# Altium PCB hazi_kiindulas.PcbDoc
Units mil, origin at the board's own origin, x right, y up, seen from the top; angles counter-clockwise.
Board outline 3550 x 2300 mil, 2 copper layers (Top Layer, Bottom Layer); 101 components, 50 nets, 318 pads, 95 vias.
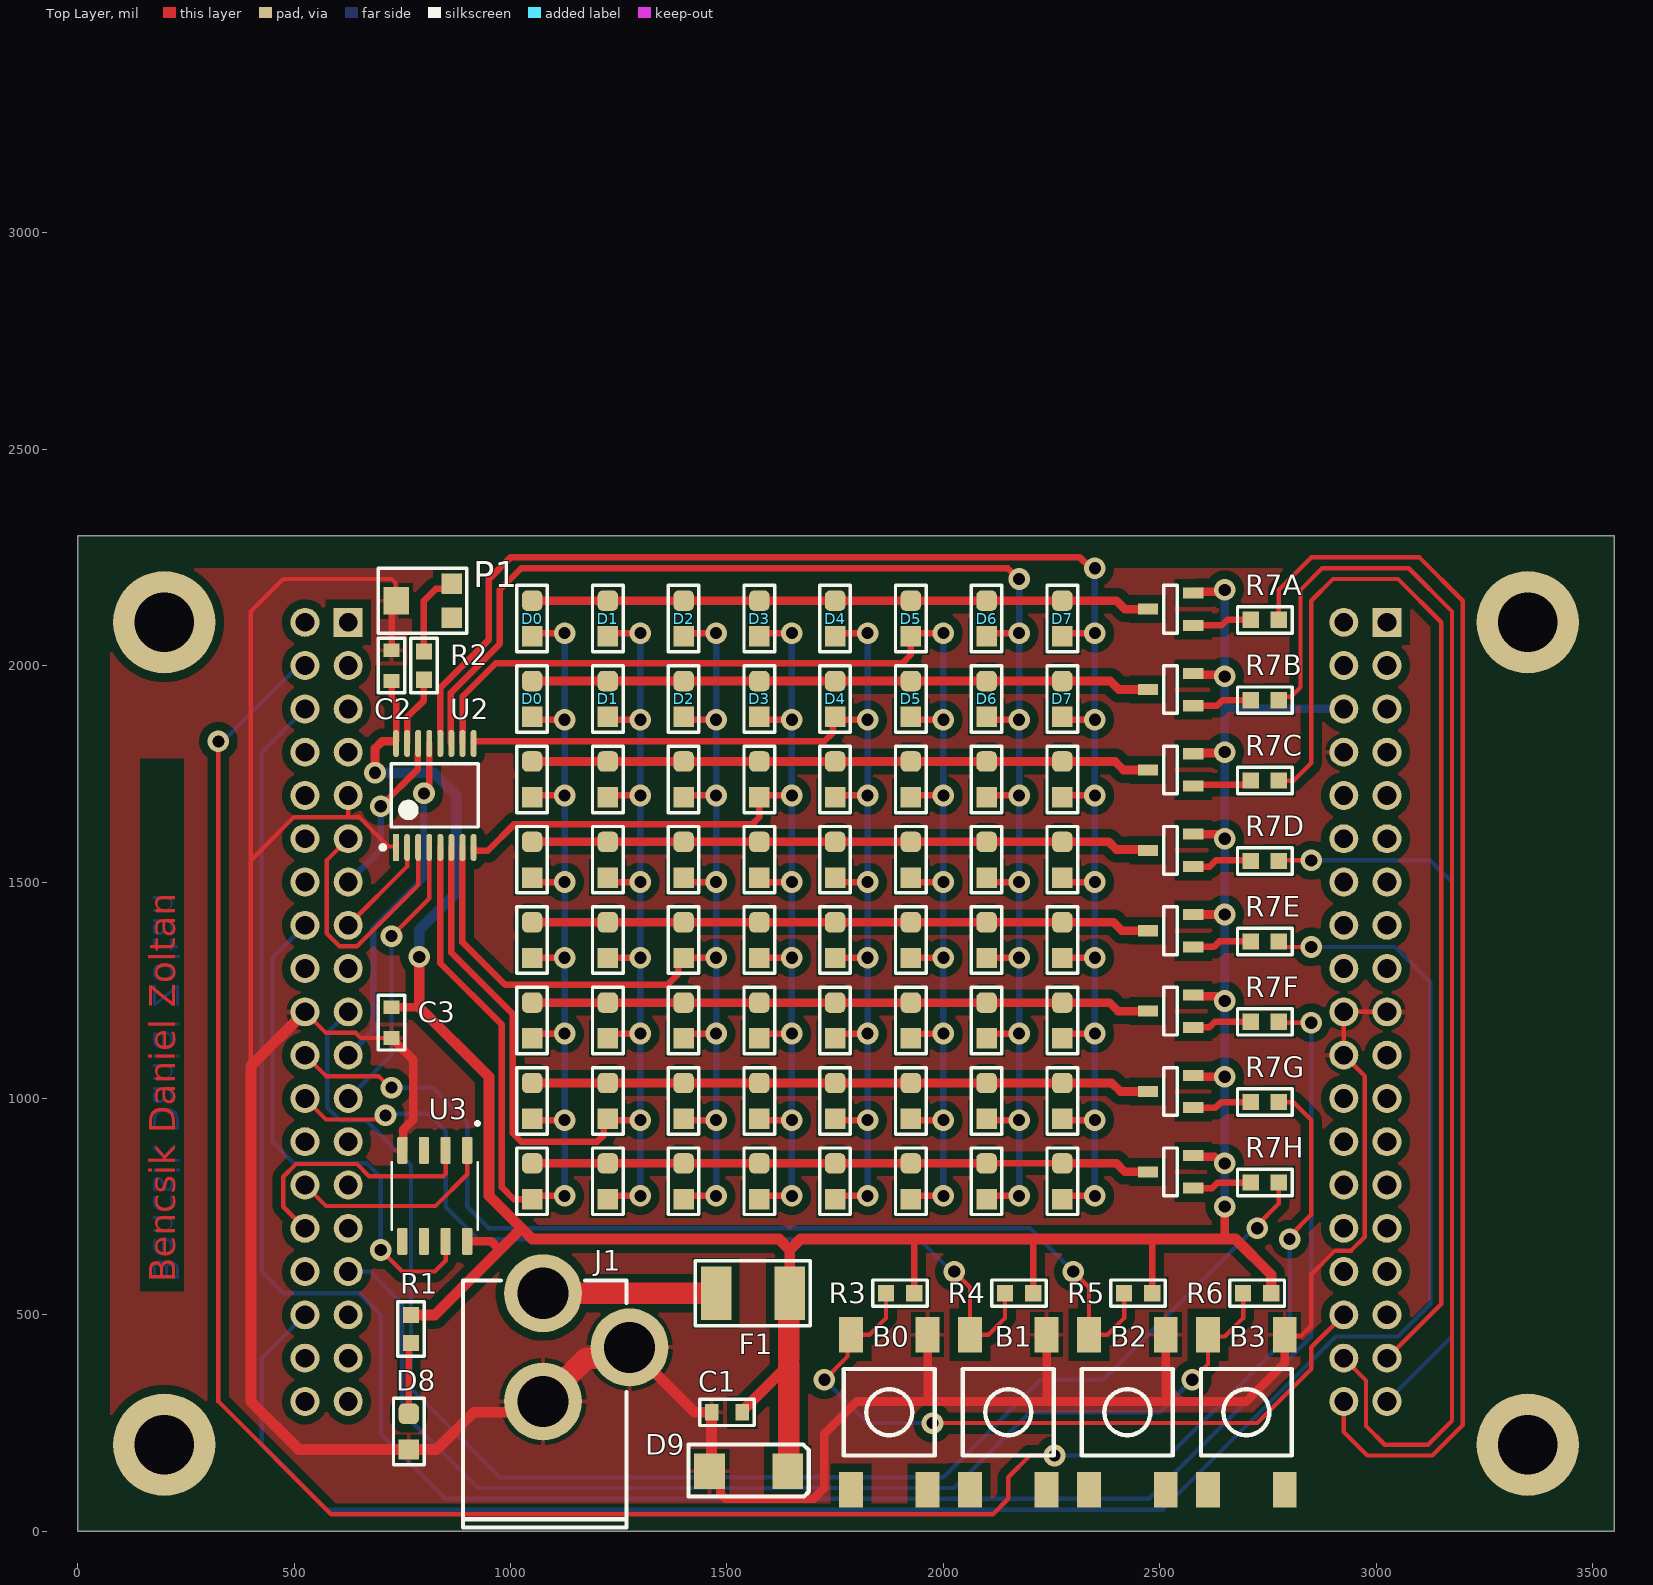
[diagram p0: Top Layer view]
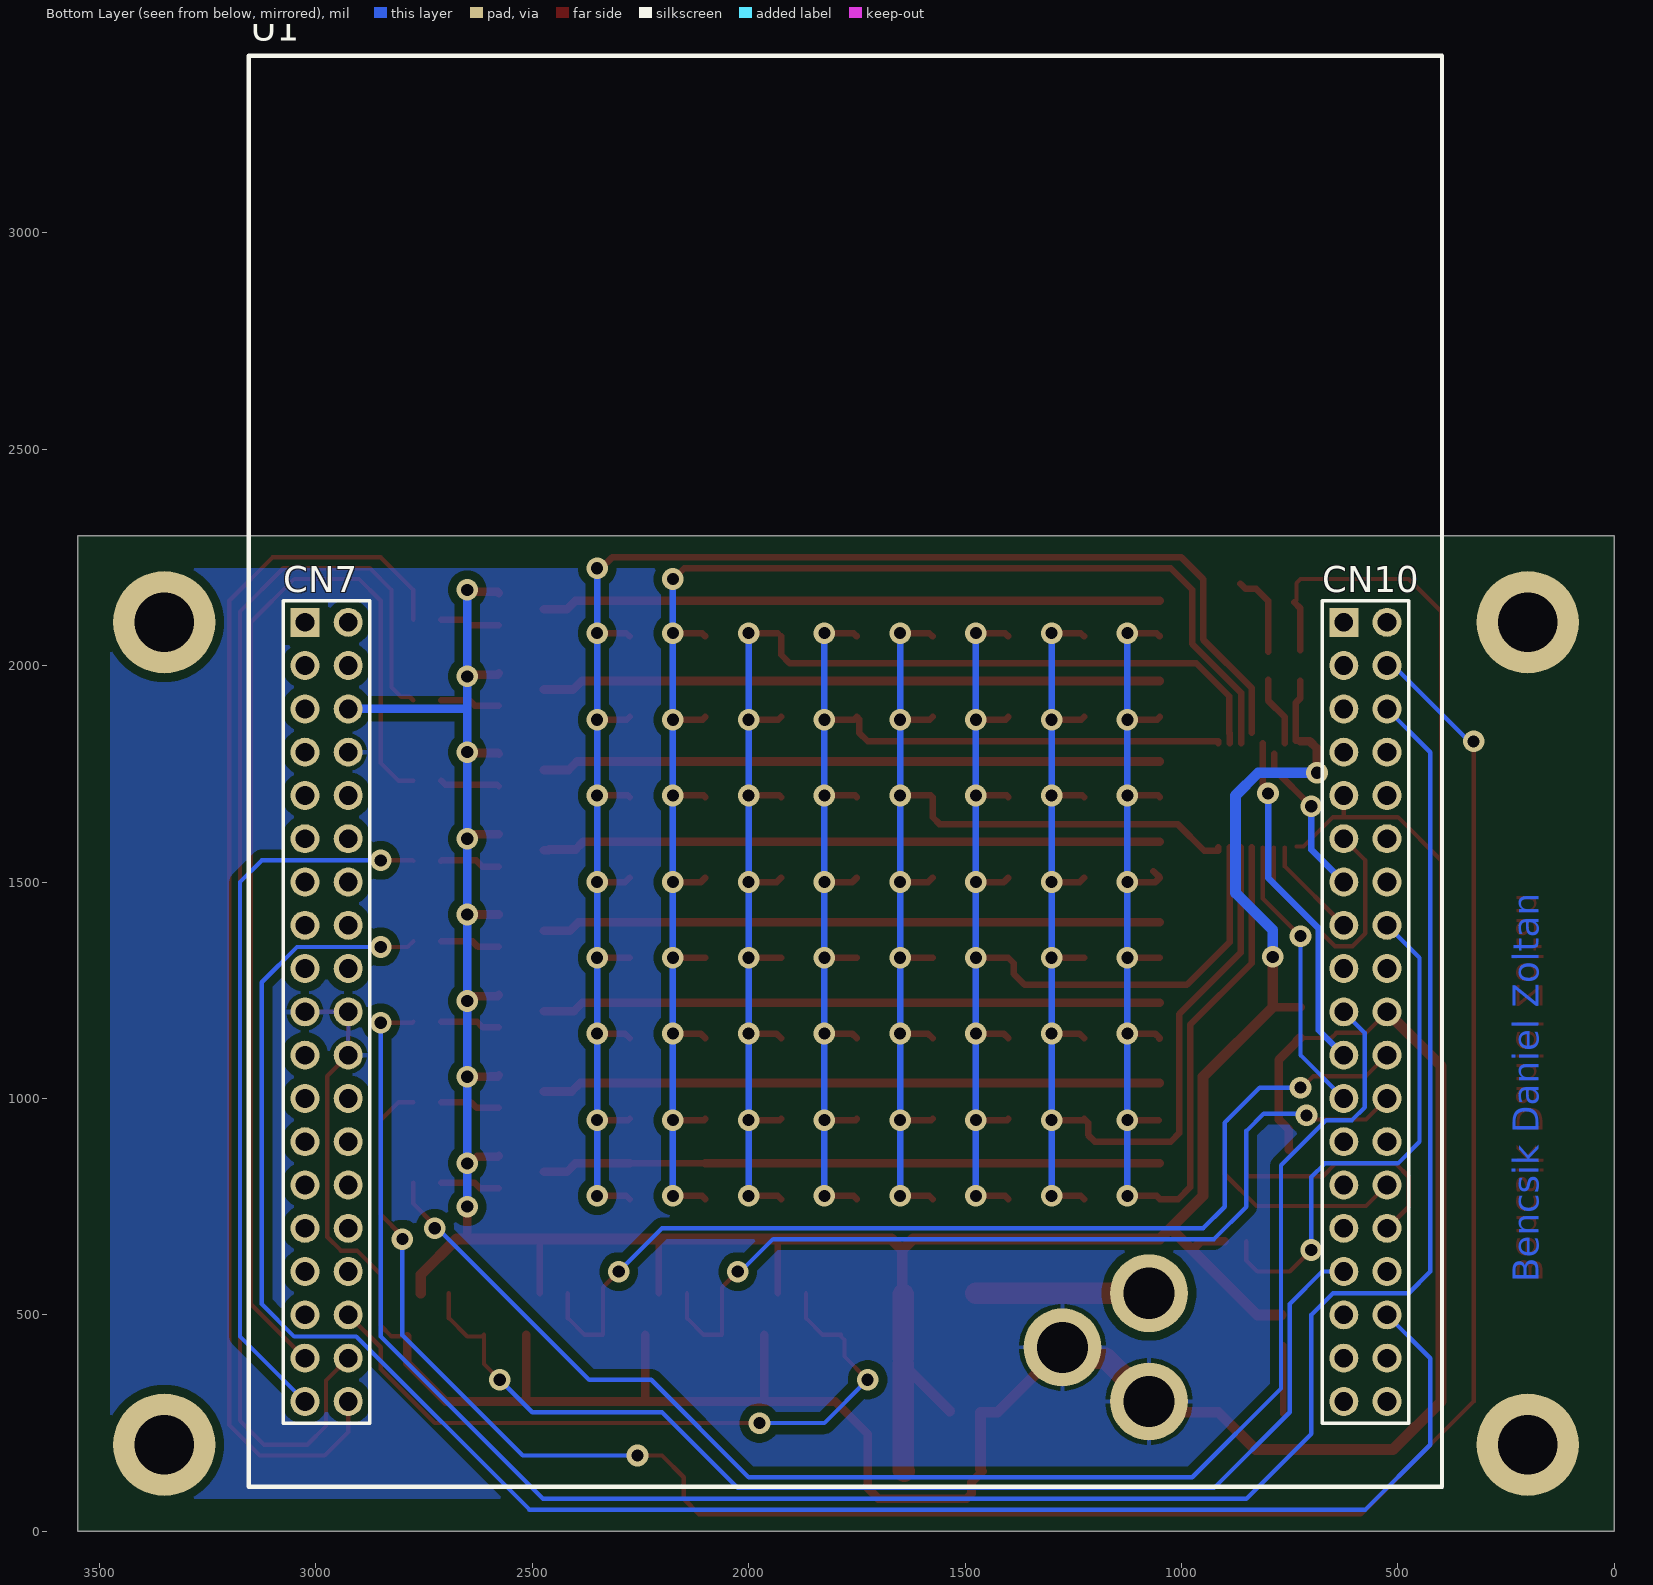
[diagram p1: Bottom Layer view, seen from below]
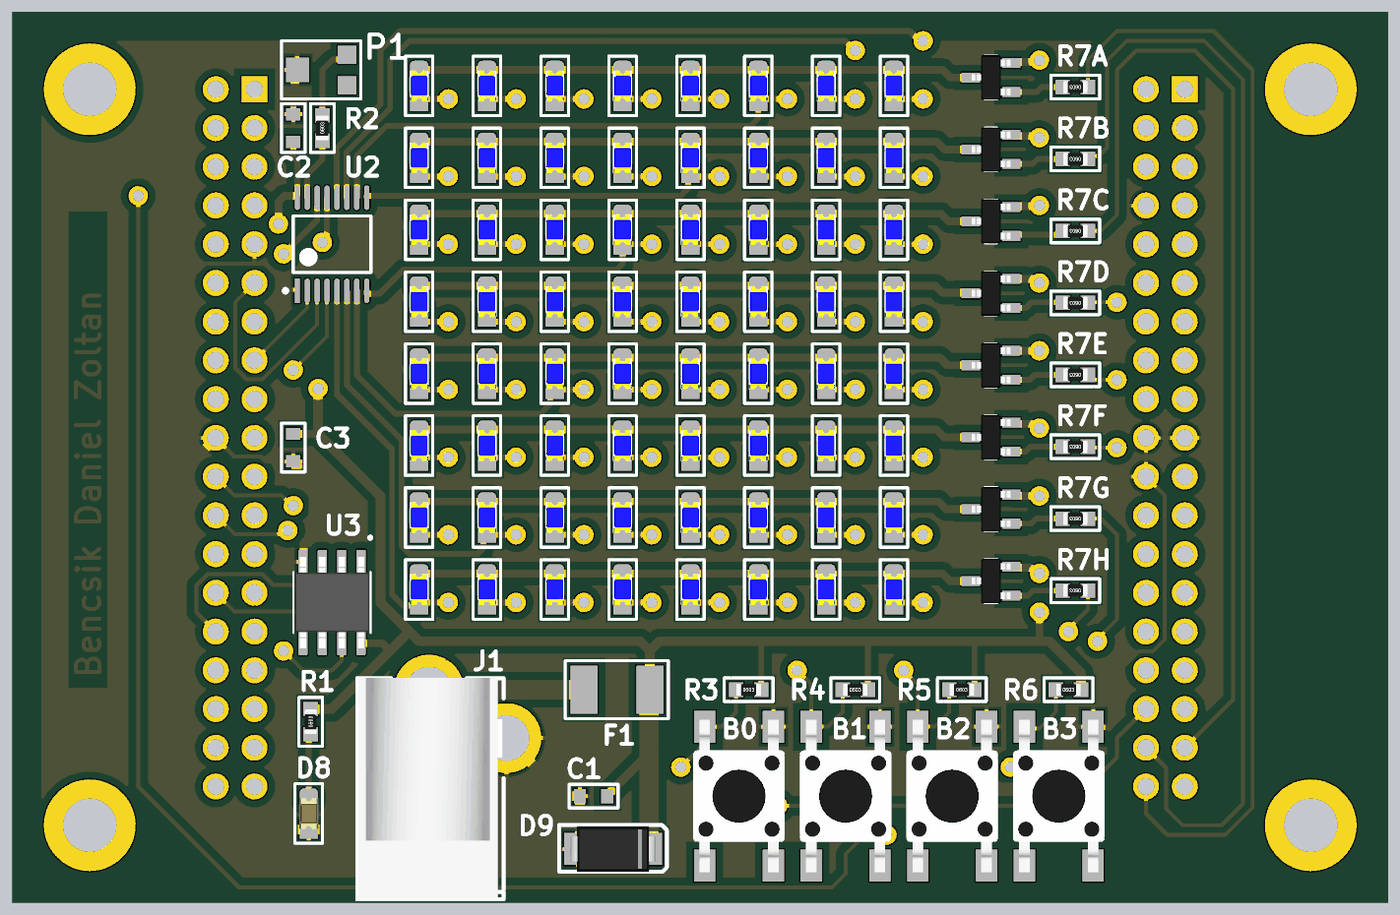
[diagram p2: 3D render of the assembled board from above, using the file's embedded part models]

## Layer stack, top to bottom
Top Solder: solder mask 0.4, Solder Resist, Dk 3.5
Top Layer: signal copper 1.4
Dielectric 1: dielectric 12.6, FR-4, Dk 4.8
Bottom Layer: signal copper 1.4
Bottom Solder: solder mask 0.4, Solder Resist, Dk 3.5

## Board outline
0,0 3550,0 3550,2300 0,2300

## Design rules (kind name [scope] priority, off if disabled: settings)
Clearance [All] p1: gap=10 ignorepadtopadclearanceinfootprint=FALSE except(0: Arc-Hole Track-Hole SMDPad-Hole THPad-Hole Via-Hole Fill-Hole Poly-Hole Region-Hole Text-Hole; 20: Arc-Poly Track-Poly SMDPad-Poly THPad-Poly Via-Poly Fill-Poly Poly-Poly)
HoleSize [All] p1: absolutevalues=TRUE maxlimit=196.85 minlimit=1 maxpercent=80.000 minpercent=20.000
PolygonConnect [All] p1: connectstyle=Relief reliefconductorwidth=10 reliefentries=4 polygonreliefangle="90 Angle" airgapwidth=10
RoutingVias [All] p1: holewidth=28 width=50 viastyle="Through Hole" minholewidth=28 minwidth=50 maxholewidth=28 maxwidth=50
SolderMaskExpansion [All] p1: expansion=4 istentingtop=FALSE
Width [All] p1: maxlimit=100 minlimit=10 preferedwidth=10
29 further rules are at their usual default settings.

## Classes and differential pairs
channel class Ledsor: U_Ledsor1 U_Ledsor2 U_Ledsor3 U_Ledsor4 U_Ledsor5 U_Ledsor6 U_Ledsor7 U_Ledsor8
component class U_Vezerlo: B0 B1 B2 B3 C1 C2 C3 D8 D9 F1 J1 P1 R1 R2 R3 R4 R5 R6 U2 U3
component class U_Ledsor8: D0H D1H D2H D3H D4H D5H D6H D7H Q1H R7H
component class U_Ledsor7: D0G D1G D2G D3G D4G D5G D6G D7G Q1G R7G
component class U_Ledsor6: D0F D1F D2F D3F D4F D5F D6F D7F Q1F R7F
component class U_Ledsor5: D0E D1E D2E D3E D4E D5E D6E D7E Q1E R7E
component class U_Ledsor4: D0D D1D D2D D3D D4D D5D D6D D7D Q1D R7D
component class U_Ledsor3: D0C D1C D2C D3C D4C D5C D6C D7C Q1C R7C
component class U_Ledsor2: D0B D1B D2B D3B D4B D5B D6B D7B Q1B R7B
component class U_Ledsor1: D0A D1A D2A D3A D4A D5A D6A D7A Q1A R7A
component class U_Nucleo: U1

## Components (designator, comment, footprint, x,y, rotation, side; value= is the part's Value field where it differs from the comment)
B0 "Button" FP_BTN_SMD 1875,275 r0 top
B1 "Button" FP_BTN_SMD 2150,275 r0 top
B2 "Button" FP_BTN_SMD 2425,275 r0 top
B3 "Button" FP_BTN_SMD 2700,275 r0 top
C1 "100nF" FP_0603_CAP_080 1500,275 r0 top
C2 "100nF" FP_0603_CAP_080 725,2000 r270 top
C3 "100nF" FP_0603_CAP_080 725,1175 r90 top
D0 "LED" HF_FP_0805_LED_BLUE 1049.8,808.68 r270 top
D0 "LED" HF_FP_0805_LED_BLUE 1049.8,994.39 r270 top
D0 "LED" HF_FP_0805_LED_BLUE 1049.8,1180.11 r270 top
D0 "LED" HF_FP_0805_LED_BLUE 1049.8,1365.82 r270 top
D0 "LED" HF_FP_0805_LED_BLUE 1049.8,1551.54 r270 top
D0 "LED" HF_FP_0805_LED_BLUE 1049.8,1737.25 r270 top
D0 "LED" HF_FP_0805_LED_BLUE 1049.8,1922.96 r270 top
D0 "LED" HF_FP_0805_LED_BLUE 1049.8,2108.68 r270 top
D1 "LED" HF_FP_0805_LED_BLUE 1224.8,808.68 r270 top
D1 "LED" HF_FP_0805_LED_BLUE 1224.8,994.39 r270 top
D1 "LED" HF_FP_0805_LED_BLUE 1224.8,1180.11 r270 top
D1 "LED" HF_FP_0805_LED_BLUE 1224.8,1365.82 r270 top
D1 "LED" HF_FP_0805_LED_BLUE 1224.8,1551.54 r270 top
D1 "LED" HF_FP_0805_LED_BLUE 1224.8,1737.25 r270 top
D1 "LED" HF_FP_0805_LED_BLUE 1224.8,1922.96 r270 top
D1 "LED" HF_FP_0805_LED_BLUE 1224.8,2108.68 r270 top
D2 "LED" HF_FP_0805_LED_BLUE 1399.8,808.68 r270 top
D2 "LED" HF_FP_0805_LED_BLUE 1399.8,994.39 r270 top
D2 "LED" HF_FP_0805_LED_BLUE 1399.8,1180.11 r270 top
D2 "LED" HF_FP_0805_LED_BLUE 1399.8,1365.82 r270 top
D2 "LED" HF_FP_0805_LED_BLUE 1399.8,1551.54 r270 top
D2 "LED" HF_FP_0805_LED_BLUE 1399.8,1737.25 r270 top
D2 "LED" HF_FP_0805_LED_BLUE 1399.8,1922.96 r270 top
D2 "LED" HF_FP_0805_LED_BLUE 1399.8,2108.68 r270 top
D3 "LED" HF_FP_0805_LED_BLUE 1574.8,808.68 r270 top
D3 "LED" HF_FP_0805_LED_BLUE 1574.8,994.39 r270 top
D3 "LED" HF_FP_0805_LED_BLUE 1574.8,1180.11 r270 top
D3 "LED" HF_FP_0805_LED_BLUE 1574.8,1365.82 r270 top
D3 "LED" HF_FP_0805_LED_BLUE 1574.8,1551.54 r270 top
D3 "LED" HF_FP_0805_LED_BLUE 1574.8,1737.25 r270 top
D3 "LED" HF_FP_0805_LED_BLUE 1574.8,1922.96 r270 top
D3 "LED" HF_FP_0805_LED_BLUE 1574.8,2108.68 r270 top
D4 "LED" HF_FP_0805_LED_BLUE 1749.8,808.68 r270 top
D4 "LED" HF_FP_0805_LED_BLUE 1749.8,994.39 r270 top
D4 "LED" HF_FP_0805_LED_BLUE 1749.8,1180.11 r270 top
D4 "LED" HF_FP_0805_LED_BLUE 1749.8,1365.82 r270 top
D4 "LED" HF_FP_0805_LED_BLUE 1749.8,1551.54 r270 top
D4 "LED" HF_FP_0805_LED_BLUE 1749.8,1737.25 r270 top
D4 "LED" HF_FP_0805_LED_BLUE 1749.8,1922.96 r270 top
D4 "LED" HF_FP_0805_LED_BLUE 1749.8,2108.68 r270 top
D5 "LED" HF_FP_0805_LED_BLUE 1924.8,808.68 r270 top
D5 "LED" HF_FP_0805_LED_BLUE 1924.8,994.39 r270 top
D5 "LED" HF_FP_0805_LED_BLUE 1924.8,1180.11 r270 top
D5 "LED" HF_FP_0805_LED_BLUE 1924.8,1365.82 r270 top
D5 "LED" HF_FP_0805_LED_BLUE 1924.8,1551.54 r270 top
D5 "LED" HF_FP_0805_LED_BLUE 1924.8,1737.25 r270 top
D5 "LED" HF_FP_0805_LED_BLUE 1924.8,1922.96 r270 top
D5 "LED" HF_FP_0805_LED_BLUE 1924.8,2108.68 r270 top
D6 "LED" HF_FP_0805_LED_BLUE 2099.8,808.68 r270 top
D6 "LED" HF_FP_0805_LED_BLUE 2099.8,994.39 r270 top
D6 "LED" HF_FP_0805_LED_BLUE 2099.8,1180.11 r270 top
D6 "LED" HF_FP_0805_LED_BLUE 2099.8,1365.82 r270 top
D6 "LED" HF_FP_0805_LED_BLUE 2099.8,1551.54 r270 top
D6 "LED" HF_FP_0805_LED_BLUE 2099.8,1737.25 r270 top
D6 "LED" HF_FP_0805_LED_BLUE 2099.8,1922.96 r270 top
D6 "LED" HF_FP_0805_LED_BLUE 2099.8,2108.68 r270 top
D7 "LED" HF_FP_0805_LED_BLUE 2274.8,808.68 r270 top
D7 "LED" HF_FP_0805_LED_BLUE 2274.8,994.39 r270 top
D7 "LED" HF_FP_0805_LED_BLUE 2274.8,1180.11 r270 top
D7 "LED" HF_FP_0805_LED_BLUE 2274.8,1365.82 r270 top
D7 "LED" HF_FP_0805_LED_BLUE 2274.8,1551.54 r270 top
D7 "LED" HF_FP_0805_LED_BLUE 2274.8,1737.25 r270 top
D7 "LED" HF_FP_0805_LED_BLUE 2274.8,1922.96 r270 top
D7 "LED" HF_FP_0805_LED_BLUE 2274.8,2108.68 r270 top
D8 "LED" HF_FP_0805_LED_BLUE&RED_2 764.96,230.29 r270 top
D9 "SD" FP_SMA 1550,138.6 r0 top
F1 "Fuse" FP_MULTIFUSE 1475,550 r0 top
J1 "2.xmm" FP_DC_TAP_ANYA 1075,550 r180 top
P1 "RKT-C3305" HF_POT 792.91,2150 r90 top
Q1 "PMOS" FP_SOT23-3 2525,830.33 r0 top
Q1 "PMOS" FP_SOT23-3 2525,1016.05 r0 top
Q1 "PMOS" FP_SOT23-3 2525,1201.76 r0 top
Q1 "PMOS" FP_SOT23-3 2525,1387.48 r0 top
Q1 "PMOS" FP_SOT23-3 2525,1573.19 r0 top
Q1 "PMOS" FP_SOT23-3 2525,1758.9 r0 top
Q1 "PMOS" FP_SOT23-3 2525,1944.62 r0 top
Q1 "PMOS" FP_SOT23-3 2525,2130.33 r0 top
R1 "200R" HF_FP_0603_RES 769.88,467.35 r90 top
R2 "330R" HF_FP_0603_RES 800,2000 r90 top
R3 "5K10" HF_FP_0603_RES 1900,550 r0 top
R4 "5K10" HF_FP_0603_RES 2175,550 r0 top
R5 "5K10" HF_FP_0603_RES 2450,550 r0 top
R6 "5K10" HF_FP_0603_RES 2725,550 r0 top
R7A "5K10" HF_FP_0603_RES 2742.52,2105.73 r180 top (schematic designator R7)
R7B "5K10" HF_FP_0603_RES 2742.52,1920.01 r180 top (schematic designator R7)
R7C "5K10" HF_FP_0603_RES 2742.52,1734.3 r180 top (schematic designator R7)
R7D "5K10" HF_FP_0603_RES 2742.52,1548.58 r180 top (schematic designator R7)
R7E "5K10" HF_FP_0603_RES 2742.52,1362.87 r180 top (schematic designator R7)
R7F "5K10" HF_FP_0603_RES 2742.52,1177.15 r180 top (schematic designator R7)
R7G "5K10" HF_FP_0603_RES 2742.52,991.44 r180 top (schematic designator R7)
R7H "5K10" HF_FP_0603_RES 2742.52,805.73 r180 top (schematic designator R7)
U1 "NUCLEO-F446RE" FP_NUCLEO-64 3025,2100 r180 bottom locked
U2 "STP08CP05TTR" TSOP65P640X120-16M 825,1700 r90 top
U3 "TC77-5.0MOA" HF_SOIC127P599X175-8N 825,775 r270 top

## Footprints (in the part's own frame and the unit in brackets; to place one, negate y for a bottom-side part, rotate by r counter-clockwise, add the part's x,y. Pads: shape width x height; smd on the part's side, far side on the other; paste and mask are expansions set on the pad)
FP_0603_CAP_080 [mm] "0.8mm magas 0603 kapacitás"
  rect 0.8x0.95 smd: 1(-0.9,0) 2(0.9,0)
  silkscreen extent -1.6,-0.77 1.6,0.77, body extent -0.8,-0.4 0.76,0.4, height 0.8
FP_BTN_SMD [mm] "SMD Push Button 6x6mm"
  rect 1.4x2.1 smd: 1(2.25,4.55) 2(2.25,-4.55) 3(-2.25,4.55) 4(-2.25,-4.55)
  silkscreen extent -2.67,-2.54 2.67,2.54, body extent -3,-5 3,5, height 5.1
FP_DC_TAP_ANYA [mil] "DC HEBA25 TÁPFESZÜLTSÉG ALJZAT ZÁRT, NYÁKBA 90°"
  round 180 hole 118: 1(0,0) 2(0,250) 3(-200,125)
  silkscreen extent -193,-30 185,541, body extent -190,-31 183,539, height 440
FP_MULTIFUSE [mm] "POLYFUSE SMD 1812"
  rect 1.78x3.15 smd: 1(0,0) 2(4.318,0)
  silkscreen extent -1.22,-1.9 5.53,1.9, body extent -0.12,-1.71 4.57,1.71, height 1
FP_NUCLEO-64 [mm]
  rect 1.7x1.7 hole 1.1: 1(0,0) 39(60.96,0)
  round 1.7 hole 1.1: 2(2.54,0) 3(0,-2.54) 4(2.54,-2.54) 5(0,-5.08) 6(2.54,-5.08) 7(0,-7.62) 8(2.54,-7.62) 9(0,-10.16) 10(2.54,-10.16) 11(0,-12.7) 12(2.54,-12.7) 13(0,-15.24) 14(2.54,-15.24) 15(0,-17.78) 16(2.54,-17.78) 17(0,-20.32) 18(2.54,-20.32) 19(0,-22.86) 20(2.54,-22.86) 21(0,-25.4) 22(2.54,-25.4) 23(0,-27.94) 24(2.54,-27.94) 25(0,-30.48) 26(2.54,-30.48) 27(0,-33.02) 28(2.54,-33.02) 29(0,-35.56) 30(2.54,-35.56) 31(0,-38.1) 32(2.54,-38.1) 33(0,-40.64) 34(2.54,-40.64) 35(0,-43.18) 36(2.54,-43.18) 37(0,-45.72) 38(2.54,-45.72) 40(63.5,0) 41(60.96,-2.54) 42(63.5,-2.54) 43(60.96,-5.08) 44(63.5,-5.08) 45(60.96,-7.62) 46(63.5,-7.62) 47(60.96,-10.16) 48(63.5,-10.16) 49(60.96,-12.7) 50(63.5,-12.7) 51(60.96,-15.24) 52(63.5,-15.24) 53(60.96,-17.78) 54(63.5,-17.78) 55(60.96,-20.32) 56(63.5,-20.32) 57(60.96,-22.86) 58(63.5,-22.86) 59(60.96,-25.4) 60(63.5,-25.4) 61(60.96,-27.94) 62(63.5,-27.94) 63(60.96,-30.48) 64(63.5,-30.48) 65(60.96,-33.02) 66(63.5,-33.02) 67(60.96,-35.56) 68(63.5,-35.56) 69(60.96,-38.1) 70(63.5,-38.1) 71(60.96,-40.64) 72(63.5,-40.64) 73(60.96,-43.18) 74(63.5,-43.18) 75(60.96,-45.72) 76(63.5,-45.72)
  silkscreen extent -3.3,-50.72 66.72,33.25, body extent -3.3,-50.72 66.72,33.25, height 11
FP_SMA [mm] "SMA footprint"
  rect 1.8x2.1 smd: A(-2.3,0) K(2.3,0)
  silkscreen extent -3.52,-1.48 3.52,1.58, body extent -2.8,-1.47 2.8,1.48, height 2.7
FP_SOT23-3 [mm] "SOT23-3 tok"
  rect 1.2x0.65 smd: 1(1.327,-0.95) 2(1.327,0.95) 3(-1.327,0)
  silkscreen extent -0.4,-1.4 0.4,1.4, body extent -1.27,-1.46 1.27,1.46, height 0.97
HF_FP_0603_RES [mm] "0603 ellenállás nagyobb pad-del"
  rect 0.95x0.95 smd: 1(-0.825,0) 2(0.825,0)
  silkscreen extent -1.6,-0.77 1.6,0.77, body extent -0.8,-0.4 0.8,0.4, height 0.44
HF_FP_0805_LED_BLUE [mm] "0805 méretű kék LED"
  rrect50% 1.2x1.2 smd: A(-1.05,0)
  rect 1.2x1.2 smd: K(1.05,0)
  silkscreen extent -1.95,-0.9 1.95,0.9, body extent -1.01,-0.62 1.01,0.62, height 1.1
HF_FP_0805_LED_BLUE&RED_2 [mm] "0805 méretű piros LED"
  rrect50% 1.2x1.2 smd: A(-1.05,0)
  rect 1.2x1.2 smd: K(1.05,0)
  silkscreen extent -1.95,-0.9 1.95,0.9, body extent -1,-0.62 1.02,0.62, height 1.1
HF_POT [mm]
  rect 1.2x1.2 smd: 1(-1,-1.8) 3(1,-1.8)
  rect 1.6x1.5 smd: 2(0,1.45)
  silkscreen extent -1.9,-2.7 1.9,2.5
HF_SOIC127P599X175-8N [mm] "MICROCHIP - TC77-5.0MOA"
  rrect25% 1.58x0.6 smd: 1(-2.67,1.905) 2(-2.67,0.635) 3(-2.67,-0.635) 4(-2.67,-1.905) 5(2.67,-1.905) 6(2.67,-0.635) 7(2.67,0.635) 8(2.67,1.905)
  silkscreen extent -4.35,-2.52 1.99,2.6, body extent -3,-2.45 3,2.45, height 1.75
TSOP65P640X120-16M [mm] "TSOP, 16-Leads, Body 5,00x4,40mm, Pitch 0,65mm, IPC Low Density"
  rect 1.6x0.35 smd: 1(-3.05,2.275)
  oval 1.6x0.35 smd: 2(-3.05,1.625) 3(-3.05,0.975) 4(-3.05,0.325) 5(-3.05,-0.325) 6(-3.05,-0.975) 7(-3.05,-1.625) 8(-3.05,-2.275) 9(3.05,-2.275) 10(3.05,-1.625) 11(3.05,-0.975) 12(3.05,-0.325) 13(3.05,0.325) 14(3.05,0.975) 15(3.05,1.625) 16(3.05,2.275)
  silkscreen extent -3.17,-2.55 1.85,3.17, body extent -2.25,-2.55 2.25,2.55, height 1.2

## Part data
B0 B1 B2 B3: library part "Button 4P", "Push button", Name="TACT 6x 6 4P SPST 2 FSM4JSMA (TYC) 50mA 12VDC SMD H=5mm 160g BLACK B. 4-1437565-1", Reference=45-05-43, Supplier=Lomex
C1 C2 C3: library part CAP, "Capacitor", Name="100nF 0603 10% 50V X7R CC0603KPX7R9BB104 (YAG)", Reference=82-12-71, Supplier=Lomex
D0 D0 D0 D0 D0 D0 D0 D0 D1 D1 D1 D1 D1 D1 D1 D1 D2 D2 D2 D2 D2 D2 D2 D2 D3 D3 D3 D3 D3 D3 D3 D3 D4 D4 D4 D4 D4 D4 D4 D4 D5 D5 D5 D5 D5 D5 D5 D5 D6 D6 D6 D6 D6 D6 D6 D6 D7 D7 D7 D7 D7 D7 D7 D7 D8: "Typical RED GaAs LED"
  D8: Name="2012 RED 631nm 80mcd FYLS-0805URC (FYL) W.CLEAR 2x1.2x0.8mm 0805 130°", Reference=95-02-74, Supplier=Lomex
D9: library part ZENER, "Zener Diode", Name=SMAJ5.0A-E3/5A, Reference=1815679, Supplier=Farnell, U_Z=24
J1: library part DC_TAP_ANYA, "2.xmm DC HEBA25 TÁPFESZÜLTSÉG ALJZAT ZÁRT, NYÁKBA 90°", Name="TÁP DC ANYA 5.5/2.1/9.5mm DCS-5521-5", Reference=43-07-67, Supplier=Lomex
P1: "TRIMMER POTENTIOMETER-3mm SMD", Name="10K0 3305-103R (KIC) 3x3.5mm CERMET", Reference=90-00-58, Supplier=Lomex
Q1 Q1 Q1 Q1 Q1 Q1 Q1 Q1: "MOSFET, P CH", Name="BSS84AK (NXP) P-FET 50V 0.18A <7.5R SOT-23 ˝VS˝", Reference=86-05-45, Supplier=Lomex
R1 R2 R3 R4 R5 R6 R7A R7B R7C R7D R7E R7F R7G R7H: library part RES, "Resistor", Supplier=Lomex
  R1: Name="200R 0603 5% RK73B1JTTD201J 0.1W (KOA) Ł", Reference=81-04-08
  R2: Name="330R 0603 5% WR06X331JTL 0.1W (WAL)", Reference=81-17-48
  R3 R4 R5 R6 R7A R7B R7C R7D R7E R7F R7G R7H: Name="5K10 0603 5% WR06X512JTL 0.1W (WAL)", Reference=81-28-96
U2: "Low voltage, low current power 8-bit shift register", Name=STP08CP05TTR, Reference=STP08CP05TTR, Supplier=Tanszék
U3: "Thermal Sensor with SPI Interface", Name=TC77-5.0MOA, Supplier=Farnell
F1: Name="1.25A 15V 1812L125/16DR POLYFUSE SMD 1812 (LFS) ˝LF125-16˝", Reference=44-04-71, Supplier=Lomex
U1: Name="Nucleo F446RE", Reference=NUCLEO, Supplier=Tanszék

## Free pads (board coordinates)
  round 236.22 hole 137.8: ""(200,200) ""(200,2100) ""(3350,200) ""(3350,2100)

## Via types
v1: diameter 50, hole 28, Top Layer to Bottom Layer, 95 vias

## Nets (pads, with @x,y where several pads share a name; then routed paths per layer and width w, separated by ;. In a path a pad name is that pad's centre, name@x,y a point inside that pad or via, vN(x,y) a via of type N, cw(c..) or ccw(c..) an arc to the next point about the centre after c; other vN are vias at no path point)
5V: C1.2 C2.2 C3.2 D9.K F1.2 Q1.2 R1.2 R3.2 R4.2 R5.2 R6.2 U1.6 U2.16 U3.8 | length 7252.4
  Top Layer w15: C2.2 725,1925 735.43,1914.57 U2.16@735.43,1826.75 ; R3.2 1932.48,675 ; R4.2 2207.48,675 ; R5.2 2482.48,675
  Top Layer w20: v1(686.9,1752.44) 686.9,1808.43 703.46,1825 725,1825 ; C3.2 784.03,1210.43 ; U3.8 955.12,669.88 975,650 ; C1.2 C1.2@1535.43,277.95 ; 1642.78,385.3 1642.78,400 ; Q1.2@2577.24,867.73 2580.04,864.94 2626.94,864.94 ; Q1.2@2577.24,1053.45 2580.04,1050.65 2596.46,1050.65 2597.11,1050 v1(2650,1050) ; Q1.2@2577.24,1239.16 2580.04,1236.37 v1@2630.51,1236.37 ; Q1.2@2577.24,1424.88 2577.31,1424.94 2649.94,1424.94 v1(2650,1425) ; Q1.2@2577.24,1610.59 v1@2631.29,1610.59 ; Q1.2@2577.24,1796.31 2579.09,1798.15 2648.15,1798.15 v1(2650,1800) ; Q1.2@2577.24,1982.02 2580.04,1979.22 2645.78,1979.22 v1(2650,1975) ; Q1.2@2577.24,2167.73 2580.04,2170.53 2645.53,2170.53 v1(2650,2175) ; 2650,675 v1(2650,750)
  Top Layer w25: R1.2 824.83,499.83 975,650 1025,700 ; 786.8,1213.2 950,1050 950,775 1025,700 ; 789.04,1215.44 v1(789.04,1327.16) ; C1.2@1535.43,277.95 1642.78,385.3 ; F1.2 1645,650 ; R6.2 2757.48,592.52 2675,675 2650,675 2482.48,675 2207.48,675 1932.48,675 1670,675 1645,650 ; 1025,700 1050,675 1620,675 1645,650
  Top Layer w50: D9.K 1642.78,140.83 1642.78,385.3 ; 1642.78,400 F1.2@1642.78,547.78
  Bottom Layer w20: v1(2650,750) v1(2650,850) v1(2650,1050) v1(2650,1225) v1(2650,1425) v1(2650,1600) v1(2650,1800) 2650,1900 ; v1(2650,2175) v1(2650,1975) 2650,1900 ; U1.6 2650,1900
  Bottom Layer w25: v1(686.9,1752.44) 822.56,1752.44 875,1700 875,1475 789.04,1389.04 v1(789.04,1327.16)
GND: B0.1 B1.1 B2.1 B3.1 C1.1 C2.1 C3.1 D8.K D9.A J1.2 J1.3 P1.2 U1.8 U1.19 U1.20 U1.22 U1.47 U1.58 U2.1 U3.4 | length 7998.5
  Top Layer w10: 400,1075 400,1550 ; U1.58 573.46,1151.54 642,1151.54 653.97,1139.57 C3.1 ; U1.47 625,1650 ; U2.1@734.24,1582.07 717.93,1582.07 650,1650 625,1650 ; P1.2 734.36,2151.46 734.36,2190.64 725,2200 475,2200 400,2125 400,1550 ; B3.1 2792.43,450.28 2825.28,450.28 2850,475 2850,593.54 2904.93,648.46 2942,648.46 2973.46,679.93 2973.46,1051.54 U1.22 U1.20 U1.19 ; 400,1550 500,1650 625,1650
  Top Layer w15: C2.1 725,2132.09 P1.2@739.37,2146.46
  Top Layer w20: C3.1 727.95,1139.57 733.7,1133.82 733.7,1130.87 775,1089.57 775,951.36 751.81,928.17 751.81,881.93 U3.4 ; D9.A@1464.57,143.72 D9.A 1484.88,113.17 1484.88,86.72 1496.6,75 1700,75 1725,100 1725,225 1800,300 1963.58,300 ; B0.1 1963.58,300 ; B1.1 2238.58,300 ; B2.1 2513.58,300 ; B3.1@2788.58,450 2788.58,388.58 2700,300 2513.58,300 ; 1963.58,300 2238.58,300 ; 2238.58,300 2513.58,300
  Top Layer w25: U1.58 400,1075 400,300 511.05,188.95 D8.K 828.77,188.95 914.95,275.13 J1.2@1050.13,275.13 ; J1.3 1425,275 C1.1 D9.A@1464.57,143.72
  Top Layer w50: J1.2@1050.13,275.13 J1.2 1175.13,400.13 1250.13,400.13 J1.3
NetB0_3: B0.3 R3.1 U1.34 | length 1654.2
  Top Layer w10: v1(1725,350) 1778.65,403.65 1778.65,442.24 B0.3@1786.42,450 ; B0.3 1829.13,454.13 1867.52,492.52 R3.1 ; v1(1975,250) 2725,250 2850,375 2850,425 U1.34
  Bottom Layer w10: v1(1725,350) 1825,250 v1(1975,250)
NetB1_3: B1.3 R4.1 U1.62 | length 2094.8
  Top Layer w10: U1.62 573.46,951.54 690.71,951.54 700.17,961 v1(711,961) ; v1(2025,600) 2061.42,563.58 2061.42,467.91 B1.3 2104.13,454.13 2142.52,492.52 R4.1
  Bottom Layer w10: v1(711,961) 715,965 810,965 850,925 850,750 925,675 1943.43,675 2018.43,600 v1(2025,600)
NetB2_3: B2.3 R5.1 U1.60 | length 2411.3
  Top Layer w10: U1.60 573.46,1051.54 694.97,1051.54 721.5,1025 v1(725,1025) ; v1(2300,600) 2336.42,563.58 2336.42,467.91 B2.3 2379.13,454.13 2417.52,492.52 R5.1
  Bottom Layer w10: v1(725,1025) 819.14,1025 894.14,950 900,944.14 900,750 950,700 2200,700 v1(2300,600)
NetB3_3: B3.3 R6.1 U1.69 | length 2680.1
  Top Layer w10: v1(2575,350) 2611.42,386.42 B3.3@2611.42,450 ; B3.3 2615.55,450 2650,450 2692.52,492.52 R6.1
  Bottom Layer w10: U1.69 675,600 750,525 750,275 925,100 2025,100 2200,275 2500,275 v1(2575,350)
NetD0A_A: D0.A@1049.8,2150.02 D1.A@1224.8,2150.02 D2.A@1399.8,2150.02 D3.A@1574.8,2150.02 D4.A@1749.8,2150.02 D5.A@1924.8,2150.02 D6.A@2099.8,2150.02 D7.A@2274.8,2150.02 Q1.3@2472.76,2130.33 | length 1431.1
  Top Layer w20: D0.A@1049.8,2150.02 1224.8,2150.02 1399.8,2150.02 1574.8,2150.02 1749.8,2150.02 1924.8,2150.02 2099.8,2150.02 2274.8,2150.02 2399.98,2150.02 2419.67,2130.33 Q1.3@2472.76,2130.33
NetD0A_K: D0.K U2.5 | length 2866.5
  Top Layer w15: U2.5 837.8,1312.2 980,1170 980,795 1007.66,767.34 1049.8,767.34 1057.46,775 v1(1125,775) ; D0.K@1049.8,1324.48 1050.32,1325 v1(1125,1325) ; D0.K@1049.8,1695.91 1053.89,1700 v1(1125,1700) ; D0.K@1049.8,1881.63 1056.43,1875 v1(1125,1875) ; D0.K@1049.8,2067.34 1057.46,2075 v1(1125,2075) ; D0.K@1051.04,1137.53 1049.8,1138.77 1061.03,1150 v1(1125,1150) ; D0.K@1052.86,950 v1(1125,950) ; D0.K@1064.61,1525 1049.8,1510.2 1060,1500 v1(1125,1500)
  Bottom Layer w15: v1(1125,775) v1(1125,950) 1125.44,950.44 1125,950.89 v1(1125,1150) v1(1125,1325) v1(1125,1500) v1(1125,1700) v1(1125,1875) v1(1125,2075)
NetD0B_A: D0.A@1049.8,1964.3 D1.A@1224.8,1964.3 D2.A@1399.8,1964.3 D3.A@1574.8,1964.3 D4.A@1749.8,1964.3 D5.A@1924.8,1964.3 D6.A@2099.8,1964.3 D7.A@2274.8,1964.3 Q1.3@2472.76,1944.62 | length 1431.1
  Top Layer w20: D0.A@1049.8,1964.3 1224.8,1964.3 1399.8,1964.3 1574.8,1964.3 1749.8,1964.3 1924.8,1964.3 2099.8,1964.3 2274.8,1964.3 2385.7,1964.3 2405.38,1944.62 Q1.3@2472.76,1944.62
NetD0C_A: D0.A@1049.8,1778.59 D1.A@1224.8,1778.59 D2.A@1399.8,1778.59 D3.A@1574.8,1778.59 D4.A@1749.8,1778.59 D5.A@1924.8,1778.59 D6.A@2099.8,1778.59 D7.A@2274.8,1778.59 Q1.3@2472.76,1758.9 | length 1431.1
  Top Layer w20: D0.A@1049.8,1778.59 1224.8,1778.59 1399.8,1778.59 1574.8,1778.59 1749.8,1778.59 1924.8,1778.59 2099.8,1778.59 2274.8,1778.59 2396.41,1778.59 2416.1,1758.9 2461.93,1758.9 Q1.3@2472.76,1758.9
NetD0D_A: D0.A@1049.8,1592.87 D1.A@1224.8,1592.87 D2.A@1399.8,1592.87 D3.A@1574.8,1592.87 D4.A@1749.8,1592.87 D5.A@1924.8,1592.87 D6.A@2099.8,1592.87 D7.A@2274.8,1592.87 Q1.3@2472.76,1573.19 | length 1431.1
  Top Layer w15: Q1.3@2460.12,1575 Q1.3@2461.93,1573.19
  Top Layer w20: D0.A@1049.8,1592.87 1224.8,1592.87 1399.8,1592.87 1574.8,1592.87 1749.8,1592.87 1924.8,1592.87 2099.8,1592.87 2274.8,1592.87 2382.13,1592.87 2400,1575 Q1.3@2460.12,1575 ; Q1.3@2461.93,1573.19 Q1.3@2472.76,1573.19
NetD0E_A: D0.A@1049.8,1407.16 D1.A@1224.8,1407.16 D2.A@1399.8,1407.16 D3.A@1574.8,1407.16 D4.A@1749.8,1407.16 D5.A@1924.8,1407.16 D6.A@2099.8,1407.16 D7.A@2274.8,1407.16 Q1.3@2472.76,1387.48 | length 1431.1
  Top Layer w20: D0.A@1049.8,1407.16 1224.8,1407.16 1399.8,1407.16 1574.8,1407.16 1749.8,1407.16 1924.8,1407.16 2099.8,1407.16 2274.8,1407.16 2392.84,1407.16 2412.52,1387.48 2461.93,1387.48 Q1.3@2472.76,1387.48
NetD0F_A: D0.A@1049.8,1221.45 D1.A@1224.8,1221.45 D2.A@1399.8,1221.45 D3.A@1574.8,1221.45 D4.A@1749.8,1221.45 D5.A@1924.8,1221.45 D6.A@2099.8,1221.45 D7.A@2274.8,1221.45 Q1.3@2472.76,1201.76 | length 1431.1
  Top Layer w20: D0.A@1049.8,1221.45 1224.8,1221.45 1399.8,1221.45 1574.8,1221.45 1749.8,1221.45 1924.8,1221.45 2099.8,1221.45 2274.8,1221.45 2383.78,1221.45 2403.47,1201.76 2461.93,1201.76 Q1.3@2472.76,1201.76
NetD0G_A: D0.A@1049.8,1035.73 D1.A@1224.8,1035.73 D2.A@1399.8,1035.73 D3.A@1574.8,1035.73 D4.A@1749.8,1035.73 D5.A@1924.8,1035.73 D6.A@2099.8,1035.73 D7.A@2274.8,1035.73 Q1.3@2472.76,1016.05 | length 1431.1
  Top Layer w20: D0.A@1049.8,1035.73 1224.8,1035.73 1399.8,1035.73 1574.8,1035.73 1749.8,1035.73 1924.8,1035.73 2099.8,1035.73 2274.8,1035.73 2389.27,1035.73 2408.95,1016.05 2461.93,1016.05 Q1.3@2472.76,1016.05
NetD0H_A: D0.A@1049.8,850.02 D1.A@1224.8,850.02 D2.A@1399.8,850.02 D3.A@1574.8,850.02 D4.A@1749.8,850.02 D5.A@1924.8,850.02 D6.A@2099.8,850.02 D7.A@2274.8,850.02 Q1.3@2472.76,830.33 | length 1431.1
  Top Layer w15: D6.A@2099.8,850.02 D7.A@2274.8,850.02
  Top Layer w20: D0.A@1049.8,850.02 1224.8,850.02 1399.8,850.02 1574.8,850.02 1749.8,850.02 1924.8,850.02 D6.A@2099.8,850.02 ; D7.A@2274.8,850.02 2399.98,850.02 2419.67,830.33 2461.93,830.33 Q1.3@2472.76,830.33
NetD1A_K: D1.K U2.6 | length 2907.9
  Top Layer w15: U2.6 863.39,1336.61 1005,1195 1005,920 1025,900 1200,900 1215.72,915.72 1215.72,943.97 1224.8,953.05 1227.86,950 v1(1300,950) ; D1.K@1224.8,767.34 1232.46,775 v1(1300,775) ; D1.K@1224.8,1138.77 1236.03,1150 v1(1300,1150) ; D1.K@1224.8,1324.48 1225.32,1325 v1(1300,1325) ; D1.K@1224.8,1510.2 1235,1500 v1(1300,1500) ; D1.K@1224.8,1695.91 1228.89,1700 v1(1300,1700) ; D1.K@1224.8,1881.63 1231.43,1875 v1(1300,1875) ; D1.K@1224.8,2067.34 1232.46,2075 v1(1300,2075)
  Bottom Layer w15: v1(1300,775) v1(1300,1150) v1(1300,1325) v1(1300,1500) v1(1300,1700) v1(1300,1875) v1(1300,2075)
NetD2A_K: D2.K U2.7 | length 2733.3
  Top Layer w15: U2.7 888.98,1361.02 987.43,1262.57 1362.57,1262.57 1387.61,1287.61 1387.61,1312.29 1400.32,1325 v1(1475,1325) ; D2.K@1399.8,767.34 1407.46,775 v1(1475,775) ; D2.K@1399.8,953.05 1402.86,950 v1(1475,950) ; D2.K@1399.8,1138.77 1411.03,1150 v1(1475,1150) ; D2.K@1399.8,1510.2 1410,1500 v1(1475,1500) ; D2.K@1399.8,1695.91 1403.89,1700 v1(1475,1700) ; D2.K@1399.8,1881.63 1406.43,1875 v1(1475,1875) ; D2.K@1399.8,2067.34 1407.46,2075 v1(1475,2075)
  Bottom Layer w15: v1(1475,775) v1(1475,950) v1(1475,1150) v1(1475,1325) v1(1475,1500) v1(1475,1700) v1(1475,2075)
NetD3A_K: D3.K U2.8 | length 2662.9
  Top Layer w15: U2.8 914.57,1572.74 915.18,1572.13 947.13,1572.13 1009,1634 1559,1634 1574.8,1649.8 D3.K@1574.8,1695.91 ; D3.K@1574.8,767.34 1582.46,775 v1(1650,775) ; D3.K@1574.8,953.05 1577.86,950 v1(1650,950) ; D3.K@1574.8,1138.77 1586.03,1150 v1(1650,1150) ; D3.K@1574.8,1324.48 1575.32,1325 v1(1650,1325) ; D3.K@1574.8,1510.2 1585,1500 v1(1650,1500) ; D3.K@1574.8,1881.63 1581.43,1875 v1(1650,1875) ; D3.K@1574.8,2067.34 1582.46,2075 v1(1650,2075) ; D3.K@1578.89,1700 v1(1650,1700)
  Bottom Layer w15: v1(1650,775) v1(1650,1150) v1(1650,1325) v1(1650,1500) v1(1650,1700) v1(1650,1875) v1(1650,2075)
NetD4A_K: D4.K U2.9 | length 2804.6
  Top Layer w15: U2.9 914.57,1824.39 915.18,1825 1725,1825 1744.29,1844.29 1744.29,1876.11 1749.8,1881.63 1756.43,1875 v1(1825,1875) ; D4.K@1749.8,767.34 1757.46,775 v1(1825,775) ; D4.K@1749.8,953.05 1752.86,950 v1(1825,950) ; D4.K@1749.8,1138.77 1761.03,1150 v1(1825,1150) ; D4.K@1749.8,1324.48 1750.32,1325 v1(1825,1325) ; D4.K@1749.8,1510.2 1760,1500 v1(1825,1500) ; D4.K@1749.8,1695.91 1753.89,1700 v1(1825,1700) ; D4.K@1749.8,2067.34 1757.46,2075 v1(1825,2075)
  Bottom Layer w15: v1(1825,775) v1(1825,1150) v1(1825,1325) v1(1825,1500) v1(1825,1700) v1(1825,1875) v1(1825,2075)
NetD5A_K: D5.K U2.10 | length 3138.6
  Top Layer w15: U2.10 888.98,1843.46 889.59,1844.07 889.59,1929.2 965.81,2005.43 1905.43,2005.43 1924.8,2024.8 D5.K@1924.8,2067.34 ; D5.K@1924.8,767.34 1932.46,775 v1(2000,775) ; D5.K@1924.8,953.05 1927.86,950 v1(2000,950) ; D5.K@1924.8,1138.77 1936.03,1150 v1(2000,1150) ; D5.K@1924.8,1324.48 1925.32,1325 v1(2000,1325) ; D5.K@1924.8,1510.2 1935,1500 v1(2000,1500) ; D5.K@1924.8,1695.91 1928.89,1700 v1(2000,1700) ; D5.K@1924.8,1881.63 1931.43,1875 v1(2000,1875) ; D5.K@1932.46,2075 v1(2000,2075)
  Bottom Layer w15: v1(2000,775) v1(2000,1150) v1(2000,1325) v1(2000,1500) v1(2000,1700) v1(2000,1875) v1(2000,2075)
NetD6A_K: D6.K U2.11 | length 3680.4
  Top Layer w15: U2.11@862.19,1820.08 862.19,1937.19 975,2050 975,2175 1025,2225 2148.71,2225 2173.71,2200 v1(2175,2200) ; D6.K@2099.8,767.34 2107.46,775 v1(2175,775) ; D6.K@2099.8,953.05 2102.86,950 v1(2175,950) ; D6.K@2099.8,1138.77 2111.03,1150 v1(2175,1150) ; D6.K@2099.8,1324.48 2100.32,1325 v1(2175,1325) ; D6.K@2099.8,1510.2 2110,1500 v1(2175,1500) ; D6.K@2099.8,1695.91 2103.89,1700 v1(2175,1700) ; D6.K@2099.8,1881.63 2106.43,1875 v1(2175,1875) ; D6.K@2099.8,2067.34 2107.46,2075 v1(2175,2075)
  Bottom Layer w15: v1(2175,775) v1(2175,950) v1(2175,1150) v1(2175,1325) v1(2175,1500) v1(2175,1700) v1(2175,1875) v1(2175,2200)
NetD7A_K: D7.K U2.12 | length 3905.7
  Top Layer w15: U2.12@837.19,1844.83 837.19,1947.54 950,2060.36 950,2200 1000,2250 2315.53,2250 2340.53,2225 v1(2350,2225) ; D7.K@2274.8,767.34 2282.46,775 v1(2350,775) ; D7.K@2274.8,953.05 2277.86,950 v1(2350,950) ; D7.K@2274.8,1138.77 2286.03,1150 v1(2350,1150) ; D7.K@2274.8,1324.48 2275.32,1325 v1(2350,1325) ; D7.K@2274.8,1510.2 2285,1500 v1(2350,1500) ; D7.K@2274.8,1695.91 2278.89,1700 v1(2350,1700) ; D7.K@2274.8,1881.63 2281.43,1875 v1(2350,1875) ; D7.K@2274.8,2067.34 2282.46,2075 v1(2350,2075)
  Bottom Layer w15: v1(2350,775) v1(2350,950) v1(2350,1150) v1(2350,1325) v1(2350,1500) v1(2350,1700) v1(2350,1875) v1(2350,2225)
NetD8_A: D8.A R1.1 | length 165.3
  Top Layer w10: R1.1@764.96,429.95 R1.1
  Top Layer w15: D8.A R1.1@764.96,429.95
NetF1_1: F1.1 J1.1 | length 400
  Top Layer w50: J1.1 F1.1
NetP1_3: P1.3 R2.2 | length 197.6
  Top Layer w15: R2.2 799.99,2149.99 827.04,2177.04 851.45,2177.04 P1.3
NetQ1A_1: Q1.1@2577.24,2092.93 R7A.2 | length 138.1
  Top Layer w15: Q1.1@2577.24,2092.93 2642.93,2092.93 2655.72,2105.72 R7A.2
NetQ1B_1: Q1.1@2577.24,1907.22 R7B.2 | length 138.1
  Top Layer w15: Q1.1@2577.24,1907.22 2632.22,1907.22 2645,1920 R7B.2
NetQ1C_1: Q1.1@2577.24,1721.5 R7C.2 | length 138.1
  Top Layer w15: Q1.1@2577.24,1721.5 2580.74,1725 2700.75,1725 R7C.2
NetQ1D_1: Q1.1@2577.24,1535.79 R7D.2 | length 139.3
  Top Layer w15: Q1.1@2577.24,1535.79 2615.2,1535.79 2629.41,1550 2708.62,1550 R7D.2
NetQ1E_1: Q1.1@2577.24,1350.07 R7E.2 | length 138.1
  Top Layer w15: Q1.1@2577.24,1350.07 2625.07,1350.07 2637.86,1362.86 R7E.2
NetQ1F_1: Q1.1@2577.24,1164.36 R7F.2 | length 138.1
  Top Layer w15: Q1.1@2577.24,1164.36 2577.46,1164.58 2614.58,1164.58 2627.15,1177.15 R7F.2
NetQ1G_1: Q1.1@2577.24,978.65 R7G.2 | length 138.1
  Top Layer w15: Q1.1@2577.24,978.65 2628.65,978.65 2641.43,991.43 R7G.2
NetQ1H_1: Q1.1@2577.24,792.93 R7H.2 | length 138.1
  Top Layer w15: Q1.1@2577.24,792.93 2621.32,792.93 2634.1,805.72 R7H.2
NetR2_1: R2.1 U2.15 | length 163.6
  Top Layer w15: U2.15 761.02,1880.4 800,1919.38 R2.1
NetR7A_1: R7A.1 U1.38 | length 2868.5
  Top Layer w10: R7A.1 2775,2175 2850,2250 3100,2250 3200,2150 3200,245.67 3129.33,175 2979.33,175 2925,229.33 U1.38
NetR7B_1: R7B.1 U1.36 | length 2986.7
  Top Layer w10: R7B.1 2782.83,1927.84 2802.84,1927.84 2825,1950 2825,2175 2875,2225 3075,2225 3175,2125 3175,255.32 3119.68,200 3019.68,200 2976.54,243.14 2976.54,348.46 U1.36
NetR7C_1: R7C.1 U1.35 | length 2580.8
  Top Layer w10: R7C.1 2809.3,1734.3 2850,1775 2850,2150 2900,2200 3050,2200 3150,2100 3150,525 U1.35
NetR7D_1: R7D.1 U1.37 | length 1683.4
  Top Layer w10: R7D.1 2776.42,1550 v1(2850,1550)
  Bottom Layer w10: v1(2850,1550) 3125,1550 3175,1500 3175,450 U1.37
NetR7E_1: R7E.1 U1.72 | length 4432.9
  Top Layer w10: R7E.1 2787.87,1350 v1(2850,1350)
  Bottom Layer w10: U1.72 425,400 425,200 575,50 2506.46,50 2906.46,450 3050,450 3125,525 3125,1268.54 3043.54,1350 v1(2850,1350)
NetR7F_1: R7F.1 U1.44 | length 5101.2
  Top Layer w10: R7F.1 2777.15,1175 v1(2850,1175)
  Bottom Layer w10: U1.44 425,1800 425,600 475,550 650,550 700,500 700,225 850,75 2475,75 2850,450 v1(2850,1175)
NetR7G_1: R7G.1 U1.42 | length 5190.6
  Top Layer w10: v1(325,1825) 325,300 585.47,39.53 2114.53,39.53 2150,75 2150,125 2200,175 v1(2256.57,175) ; R7G.1 2808.56,991.44 2850,950 2850,731.57 2800,681.57 v1(2800,675)
  Bottom Layer w10: v1(325,1825) 335.82,1825 510.82,2000 U1.42 ; v1(2256.57,175) 2521.72,175 2800,453.28 v1(2800,675)
NetR7H_1: R7H.1 U1.57 | length 3409.6
  Top Layer w10: v1(2725,700) 2725,707.07 2775,757.07 R7H.1
  Bottom Layer w10: U1.57 576.54,1151.54 576.54,979.32 605.86,950 665.43,950 770,845.43 770,330 975,125 2000,125 2225,350 2368.43,350 2718.43,700 v1(2725,700)
SPI1_MISO: U1.51 U2.14 | length 362.8
  Top Layer w15: v1(700,1675) 786,1761 U2.14@786,1796.08
  Bottom Layer w15: U1.51 700,1575 v1(700,1675)
SPI1_MOSI: U1.53 U2.2 | length 236.3
  Top Layer w10: U1.53 761.02,1536.02 U2.2
SPI1_SCK: U1.49 U2.3 | length 608.7
  Top Layer w10: U1.49 575,1550 575,1381.46 604.93,1351.54 645.07,1351.54 786.61,1493.07 U2.3
SPI2_MISO: U1.66 U3.1 | length 480.6
  Top Layer w10: U1.66 573.46,751.54 826.54,751.54 900,825 U3.1
SPI2_NSS: U1.54 U3.7 | length 1220.1
  Top Layer w10: v1@707.65,657.65 v1(700,650) 750,600 825,600 850,625 U3.7
  Bottom Layer w10: U1.54 450,1325 450,900 500,850 668.43,850 700,818.43 v1(700,650)
SPI2_SCK: U1.68 U3.2 | length 595.5
  Top Layer w10: U1.68 475,750 475,819.14 504.32,848.46 645.07,848.46 673.54,820 844.14,820 850,825.86 U3.2
SR_LE: U1.61 U2.4 | length 657.5
  Top Layer w10: v1(725.05,1374.95) 812.2,1462.1 U2.4
  Bottom Layer w10: U1.61 725.05,1100.05 v1(725.05,1374.95)
SR_O\E\: U1.59 U2.13 | length 797.6
  Top Layer w15: v1(800,1704.74) 800,1714.21 812.2,1726.41 U2.13
  Bottom Layer w15: U1.59 682.55,1157.55 682.55,1392.55 800,1510 v1(800,1704.74)
pads on no net: B0.2 B0.4 B1.2 B1.4 B2.2 B2.4 B3.2 B3.4 P1.1 U1.1 U1.2 U1.3 U1.4 U1.5 U1.7 U1.9 U1.10 U1.11 U1.12 U1.13 U1.14 U1.15 U1.16 U1.17 U1.18 U1.21 U1.23 U1.24 U1.25 U1.26 U1.27 U1.28 U1.29 U1.30 U1.31 U1.32 U1.33 U1.39 U1.40 U1.41 U1.43 U1.45 U1.46 U1.48 U1.50 U1.52 U1.55 U1.56 U1.63 U1.64 U1.65 U1.67 U1.70 U1.71 U1.73 U1.74 U1.75 U1.76 U3.3 U3.5 U3.6

## Polygon pours and split planes (outlines as drawn)
GND on Bottom Layer "GND_L02_P001" (solid, remove dead copper, pour order 1): 175,2225 3400,2225 3475,2150 3475,150 3400,75 150,75 150,100 75,175 75,2125
GND on Top Layer "GND_L01_P000" (solid, remove dead copper, pour order 0): 175,2225 3375,2225 3475,2125 3475,175 3350,50 200,50 75,175 75,2125

## Other copper
Top Layer:
  text "Bencsik Daniel Zoltan" at 225,575 h60 r90
Bottom Layer:
  text "Bencsik Daniel Zoltan" at 175,575 h60 r270

## Silkscreen, mask and mechanical layers (free items; w line width, h text height)
Mechanical 1:
  the board outline again, w20

## Text inside footprints (layer, text, board x,y; h text height)
U1: Bottom Overlay "CN10" at 675,2170 h60; Bottom Overlay "CN7" at 3075,2170 h60